# EAGLE board millionOhms (EAGLE 6.1)
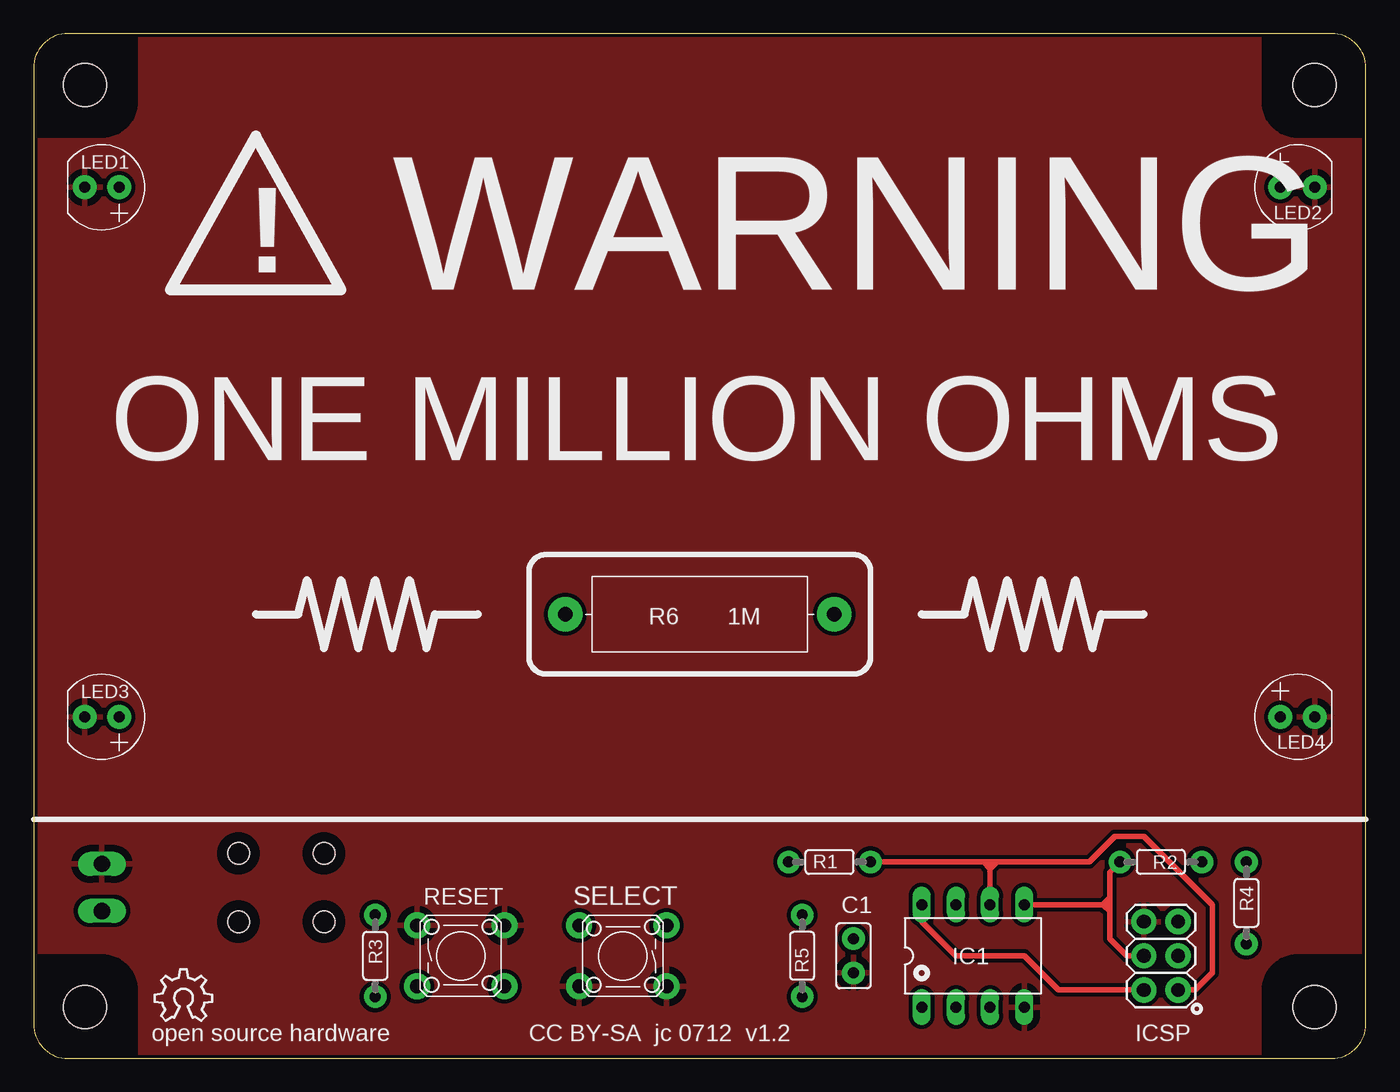
[diagram p0: board, top side]
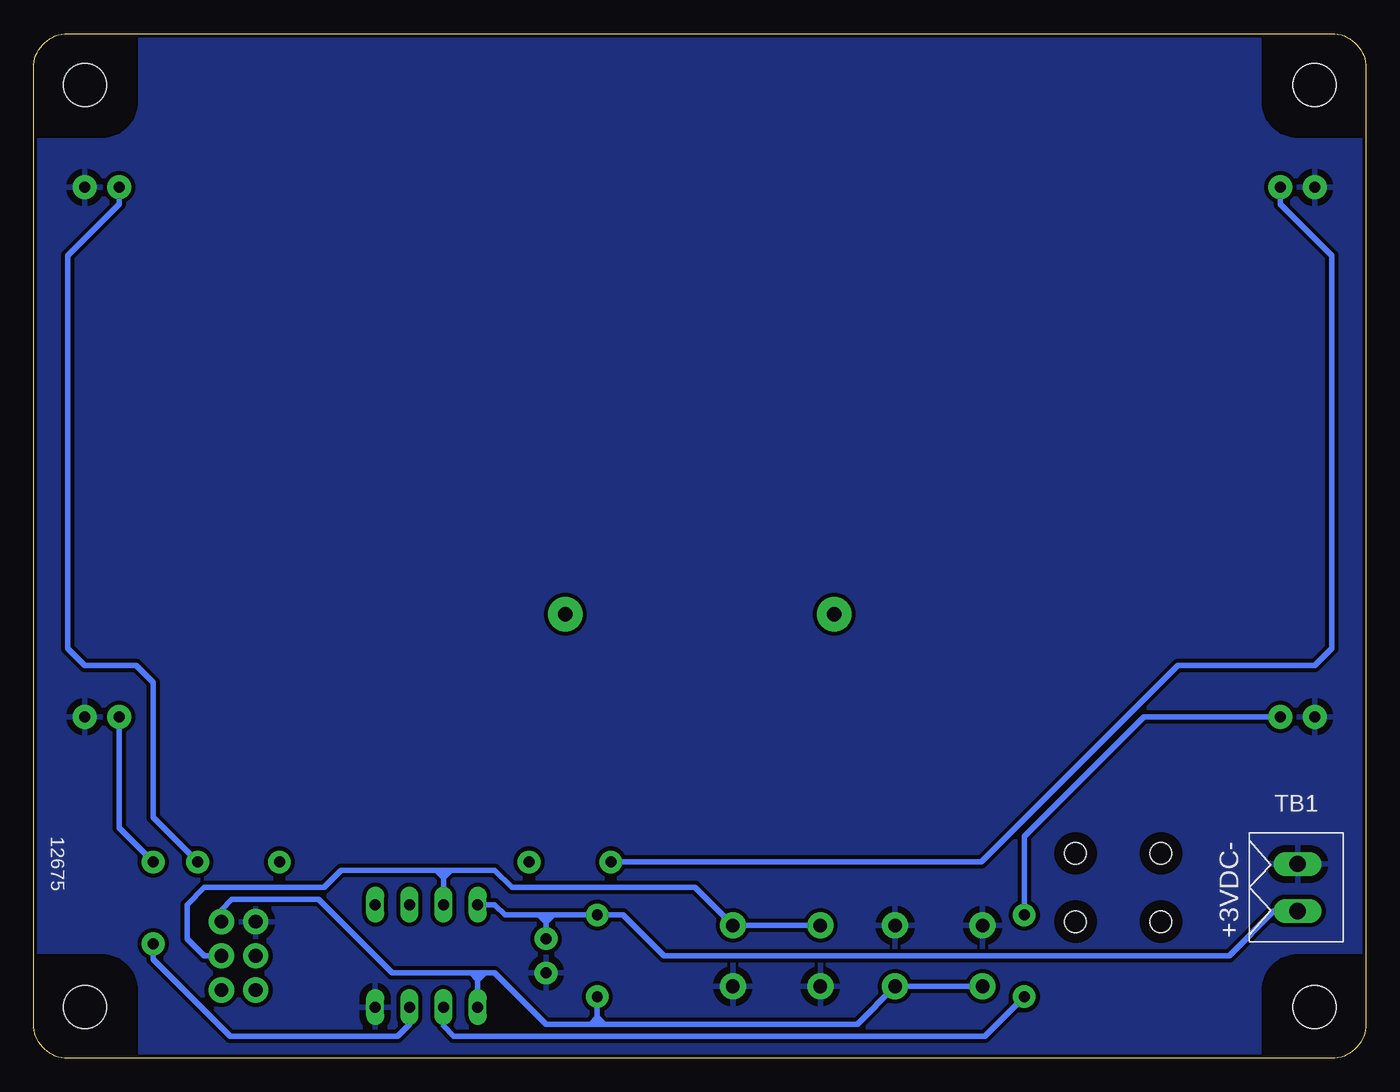
[diagram p1: board, bottom side, seen from below]

Size 99.06 x 76.2 mm. Coordinates in mm from the lower left corner, seen from the top.
Outline: 2.54,76.2 arc90 0,73.66 0,2.54 arc90 2.54,0 96.52,0 arc90 99.06,2.54 99.06,73.66 arc90 96.52,76.2 2.54,76.2
Copper layers (1*16): Top 0.035mm / dielectric 1.5mm / Bottom 0.035mm
Design rules: minimum track width 6mil, minimum drill 12mil, track to track 12mil, track to pad 12mil, pad to pad 12mil, via to via 12mil, smd to smd 0mil, copper to edge 10mil, drill to drill 10mil, minimum pad ring 10mil, minimum via ring 6mil, stop-mask expansion 2mil, vias tented up to drill 100mil, thermal gap 20mil
Holes 3.2 mm at 3.81,72.39 95.25,72.39 3.81,3.81 95.25,3.81
Holes 1.6 mm at 15.24,15.24 15.24,10.16 21.59,10.16 21.59,15.24
tRestrict: area 14,14 to 16.5,16.5; area 20.3,14 to 22.9,16.5; area 20.3,8.9 to 22.9,11.4; area 14,8.9 to 16.5,11.4; area -3.8,68.6 to 7.6,78.7; area 91.4,68.6 to 101.6,78.7; area -3.8,-2.5 to 7.6,7.6; area 91.4,-2.5 to 101.6,7.6
bRestrict: area 14,14 to 16.5,16.5; area 20.3,14 to 22.9,16.5; area 20.3,8.9 to 22.9,11.4; area 14,8.9 to 16.5,11.4; area -3.8,68.6 to 7.6,78.7; area 91.4,68.6 to 101.6,78.7; area 91.4,-2.5 to 101.6,7.6; area -3.8,-2.5 to 7.6,7.6

## Footprints (pad centres in the part's own frame; a part is rotated, then mirrored left to right if it is on the bottom)
C025-025X050 = drill 0.813 pad 1.676: 1 -1.27,0; 2 1.27,0
DIL08 = drill 0.813 long: 1 -3.81,-3.81; 2 -1.27,-3.81; 3 1.27,-3.81; 4 3.81,-3.81; 5 3.81,3.81; 6 1.27,3.81; 7 -1.27,3.81; 8 -3.81,3.81
2X3 = drill 1.016 pad 1.88: 1 0,0; 2 0,2.54; 3 2.54,0; 4 2.54,2.54; 5 5.08,0; 6 5.08,2.54
LED5MM = drill 0.813 pad 1.778: A -1.27,0; K 1.27,0
0204/6 = drill 0.813 pad 1.676: 1 -3.04,0; 2 3.04,0
5616/20 = drill 1.1 pad 2.54: P$1 -10,0; P$2 10,0
B3F-10XXOCT = drill 1.016 pad 1.93: 1 -3.251,2.261; 2 3.251,2.261; 3 -3.251,-2.261; 4 3.251,-2.261
OST-TB-2-3.5MM = drill 1.2 long: P$1 1.75,0; P$2 -1.75,0

## Placement (x,y rotation side)
C1  2.2uF  [C025-025X050]  60.96,7.62 270 top
IC1  ATtiny85V-10PU  [DIL08]  69.85,7.62 0 top
J1  ICSP  [2X3]  85.09,5.08 90 top
LED1  5mm  [LED5MM]  5.08,64.77 180 top
LED2  5mm  [LED5MM]  93.98,64.77 0 top
LED3  5mm  [LED5MM]  5.08,25.4 180 top
LED4  5mm  [LED5MM]  93.98,25.4 0 top
LOGO2  OSHW_LOGO_8MILX0150-NT  [OSHW_8X150_NOTEXT]  9.02,2.79 0 top
R1  100  [0204/6]  59.18,14.61 0 top
R2  100  [0204/6]  83.82,14.61 180 top
R3  100  [0204/6]  25.4,7.62 270 top
R4  100  [0204/6]  90.17,11.56 270 top
R5  10K  [0204/6]  57.15,7.62 90 top
R6  1M  [5616/20]  49.53,33.02 0 top
S1  SELECT  [B3F-10XXOCT]  43.81,7.62 180 top
S2  RESET  [B3F-10XXOCT]  31.75,7.62 0 top
TB1  +3VDC-  [OST-TB-2-3.5MM]  5.08,12.7 270 bottom

## Library data of the parts
C1 J1 LED1-LED4 R1-R6 S1 S2 TB1 = _jc
IC1 = atmel; OC_FARNELL: unknown; OC_NEWARK: unknown
LOGO2 = ohw-logo

## Nets
GND: C1.2 IC1.4 J1.6 LED1.K LED2.K LED3.K LED4.K S1.1 S1.2 S2.1 S2.2 TB1.P$2
MISO: IC1.6 J1.1 R1.2
MOSI: IC1.5 J1.4 R2.2
N$1: LED2.A R2.1
N$2: LED1.A R1.1
N$3: LED3.A R3.1
N$4: LED4.A R4.1
N$5: R6.P$2
N$6: R6.P$1
N$15: IC1.2 R3.2
N$16: IC1.3 R4.2
RESET: IC1.1 J1.5 R5.1 S2.3 S2.4
SCK: IC1.7 J1.3 S1.3 S1.4
VCC: C1.1 IC1.8 J1.2 R5.2 TB1.P$1

## Tracks (layer width: path | path; a pad name or v marks a point on that pad's centre or on a via)
GND
  pour Bottom: -2.54,77.47 100.33,77.47 100.33,-1.27 -2.54,-1.27
  pour Top: -1.27,77.47 100.33,77.47 100.33,-1.27 -1.27,-1.27
MISO
  Top 0.406: J1.1 86.36,5.08 87.63,6.35 87.63,11.43 82.55,16.51 80.39,16.51 78.49,14.61 71.75,14.61 71.63,14.61 | 71.63,14.61 71.12,14.61 | 71.12,14.61 70.61,14.61 | 70.61,14.61 70.48,14.61 R1.2 | IC1.6 71.12,13.97 71.12,14.1 | 71.12,14.1 71.12,14.61 | 71.12,14.1 71.63,14.61 | 71.12,14.1 70.61,14.61
MOSI
  Top 0.406: J1.4 81.28,7.62 80.01,8.89 80.01,10.92 | 80.01,11.43 80.01,11.05 80.01,10.92 | 80.01,11.43 80.01,11.81 80.01,11.94 | 80.01,11.94 80.01,13.84 R2.2 | IC1.5 79.5,11.43 | 79.5,11.43 79.63,11.43 80.01,11.43 | 79.5,11.43 80.01,11.94 | 79.5,11.43 80.01,10.92
N$1
  Bottom 0.406: LED2.A 92.71,63.5 96.52,59.69 96.52,30.48 95.25,29.21 91.44,29.21 90.17,27.94 90.17,20.32 90.17,17.91 R2.1
N$2
  Bottom 0.406: LED1.A 6.35,63.5 2.54,59.69 2.54,30.48 3.81,29.21 13.97,29.21 28.57,14.61 R1.1
N$3
  Bottom 0.406: R3.1 25.4,16.51 16.51,25.4 LED3.A
N$4
  Bottom 0.406: R4.1 92.71,17.14 LED4.A
N$15
  Bottom 0.406: R3.2 28.33,1.65 67.82,1.65 68.58,2.41 IC1.2
N$16
  Bottom 0.406: IC1.3 71.12,2.54 72.01,1.65 84.45,1.65 90.17,7.37 R4.2
RESET
  Bottom 0.406: 57.15,5.08 R5.1 57.15,3.05 | S2.3 S2.4 37.82,2.54 56.64,2.54 | J1.5 85.09,11.05 84.33,11.81 77.85,11.81 72.39,6.35 66.55,6.35 | 65.53,6.35 64.77,6.35 60.96,2.54 57.66,2.54 | 65.53,6.35 66.04,6.35 | 66.04,6.35 66.55,6.35 | 56.64,2.54 57.15,2.54 | 57.15,2.54 57.66,2.54 | 57.15,2.54 57.15,3.05 | 66.04,6.35 66.04,5.84 | 66.04,5.84 IC1.1 | 66.04,5.84 66.55,6.35 | 66.04,5.84 65.53,6.35 | 57.15,3.05 56.64,2.54 | 57.15,3.05 57.66,2.54
SCK
  Bottom 0.406: S1.4 40.64,10.16 40.92,9.88 S1.3 49.89,12.7 63.5,12.7 64.77,13.97 68.07,13.97 | J1.3 86.36,7.62 87.63,8.89 87.63,11.43 86.36,12.7 77.47,12.7 76.2,13.97 69.09,13.97 | 69.09,13.97 68.58,13.97 | 68.58,13.97 68.07,13.97 | IC1.7 68.58,13.46 | 68.58,13.46 68.58,13.97 | 68.58,13.46 69.09,13.97 | 68.58,13.46 68.07,13.97
VCC
  Top 0.406: IC1.8 66.04,10.16 68.58,7.62 73.66,7.62 76.2,5.08 J1.2
  Bottom 0.406: TB1.P$1 6.83,10.95 10.16,7.62 52.2,7.62 55.24,10.67 R5.2 60.96,10.66 | 60.96,10.66 64,10.66 64.77,11.43 IC1.8 | C1.1 60.96,10.16 | 60.96,10.16 60.96,10.66 | 60.96,10.16 60.45,10.67 | 60.96,10.16 61.47,10.67

## Text on the board
tPlace: ! | WARNING | ONE MILLION OHMS
tNames: open source hardware | CC BY-SA jc 0712 v1.2
bNames: 12675
bDocu: Beware the resistor! | Press SELECT to turn on, or to change flashing | speed and pattern. Hold SELECT to turn off. | Turns off automatically after five minutes. | CC BY-SA jc 0712 v1.2 | Licensed under the Creative Commons Attribution-ShareAlike 3.0 | unported license, http://creativecommons.org/licenses/by-sa/3.0/ | http://tinyurl.com/BuyMohms | BUY IT | http://tinyurl.com/MakeMohms | MAKE IT | http://tinyurl.com/MohmsHW | HACK IT | http://tinyurl.com/MohmsSW